# Altium PCB SIP00949AG.PcbDoc
Units mm, origin at the board's own origin, x right, y up, seen from the top; angles counter-clockwise.
Board outline 1054.6 x 677.8 mm, 2 copper layers (Top Layer, Bottom Layer); 110 components, 76 nets, 407 pads, 112 vias.
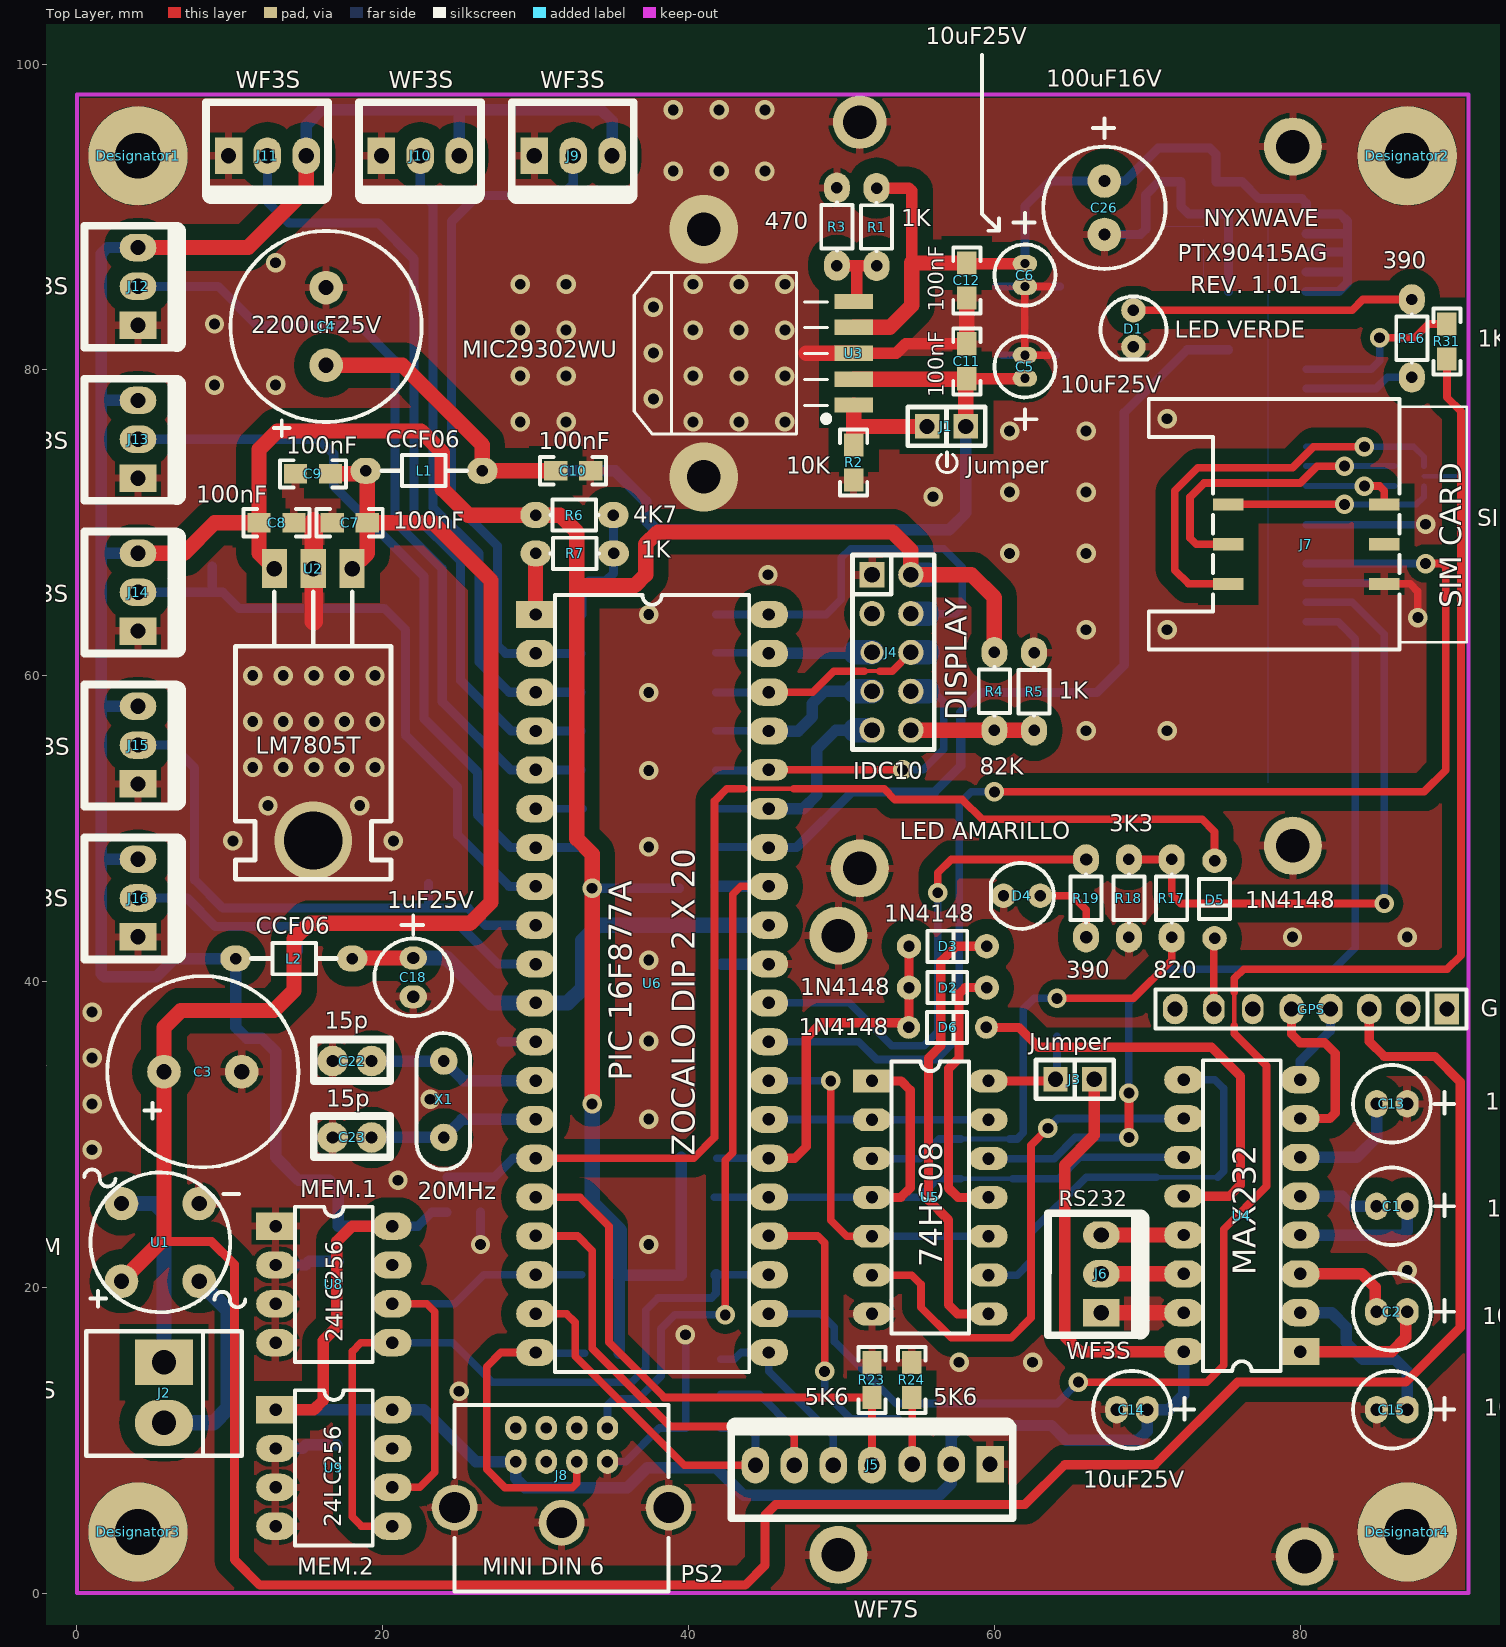
[diagram p0: Top Layer view]
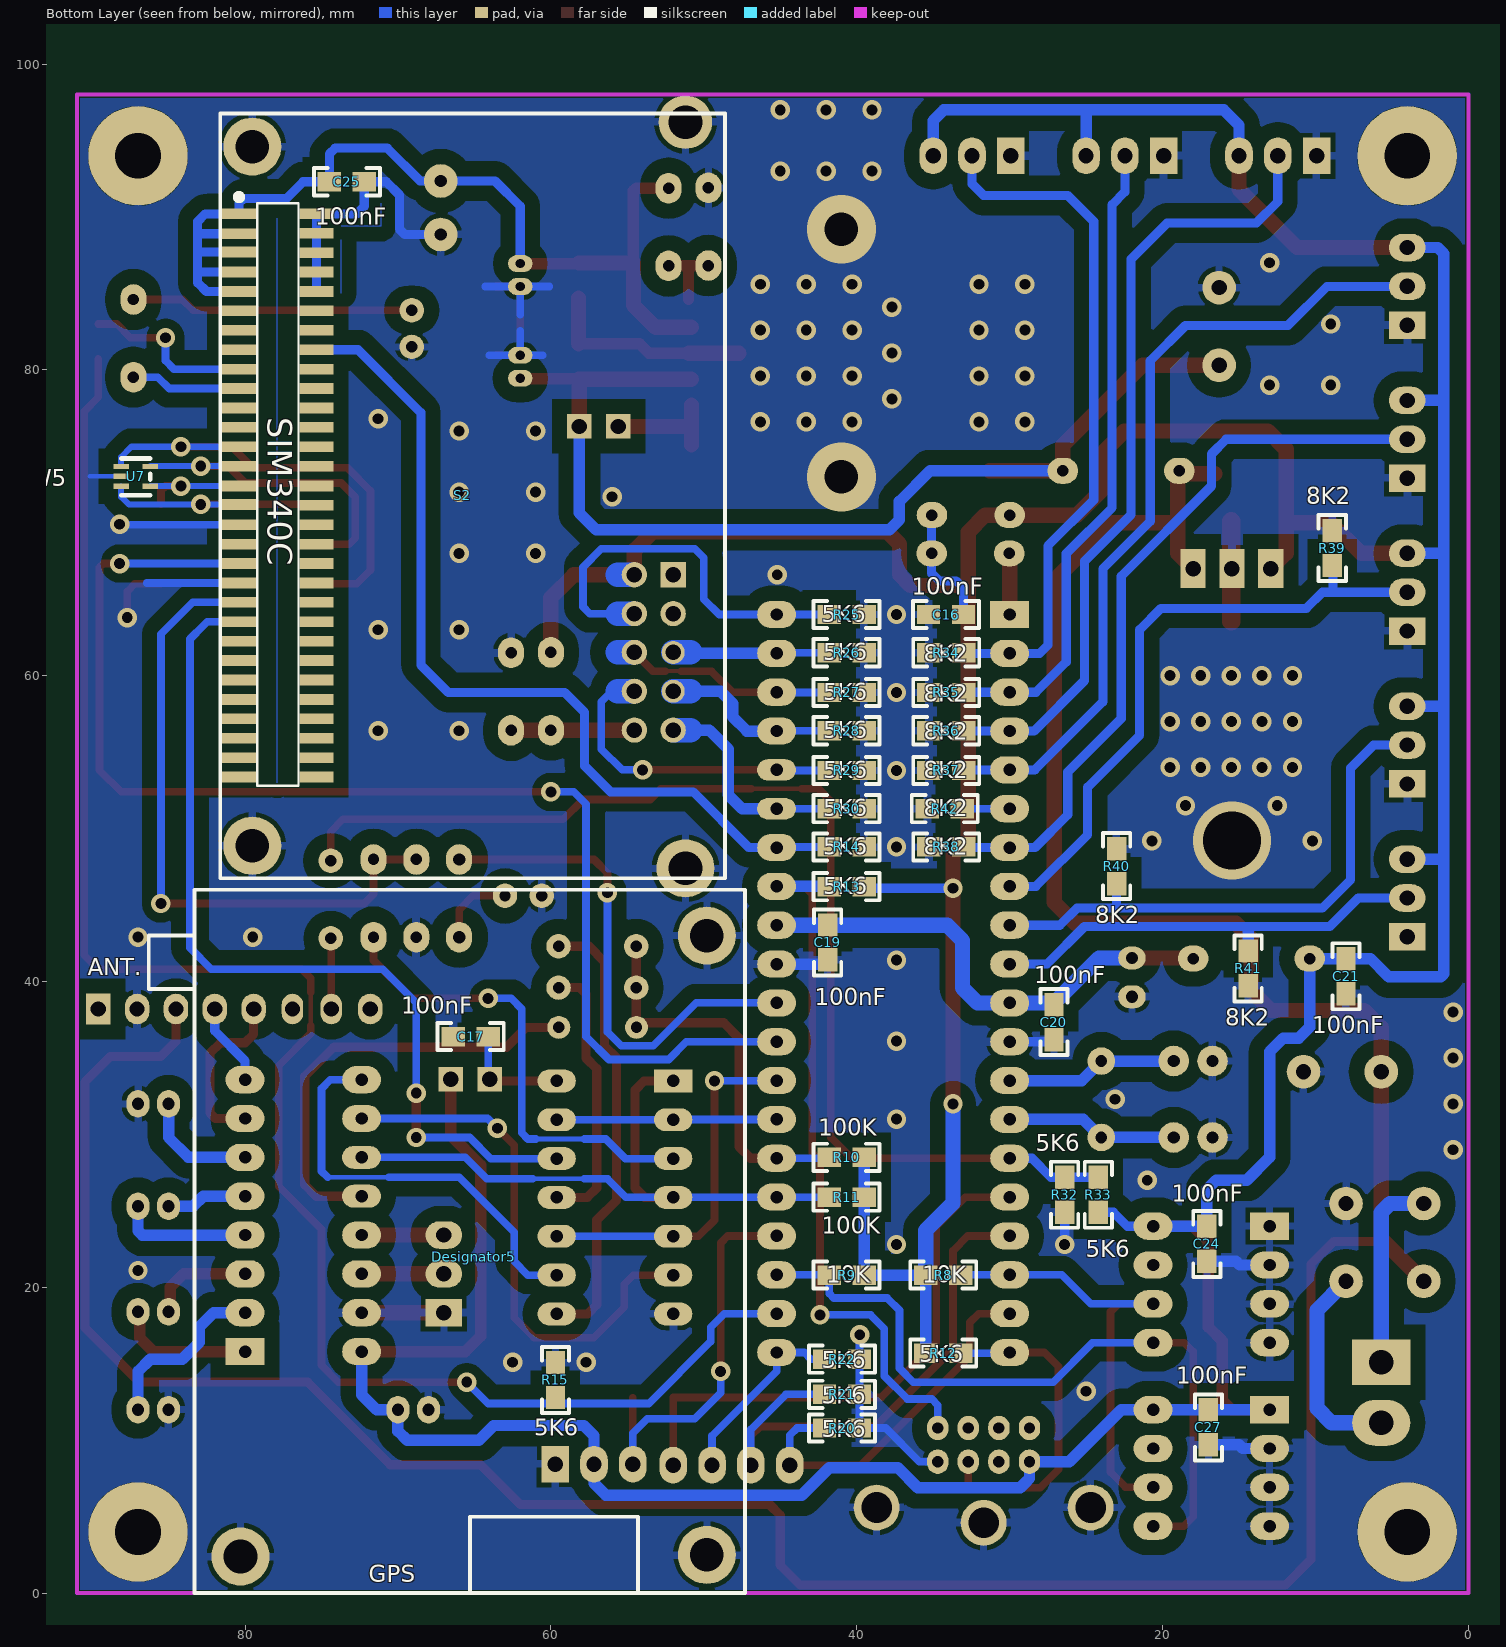
[diagram p1: Bottom Layer view, seen from below]

## Layer stack, top to bottom
Top Layer: signal copper 0.0356
Dielectric: dielectric 0.32, FR-4, Dk 4.8
Bottom Layer: signal copper 0.0356

## Board outline
-491,-342.1 -491,335.7 563.6,335.7 563.6,-342.1

## Design rules (kind name [scope] priority, off if disabled: settings)
Clearance VIAS [InNet('GND') vs (IsVia)] p1: gap=0.5
Clearance pilares [InNet('GND') vs (HasFootprint('TORNILLO 4-40'))] p2: gap=0
Clearance "Keep Out" [All vs OnLayer('Keep-Out Layer')] p3: gap=0.1
Clearance GNd [InNet('GND') vs InNet('GND')] p4: gap=0.3
Clearance [All] p5: gap=1
ComponentClearance [All] p1: gap=0.254 collisioncheckmode=3 verticalgap=0.254
PolygonConnect [All] p1: connectstyle=Relief reliefconductorwidth=0.5 reliefentries=4 polygonreliefangle="90 Angle"
RoutingVias [All] p1: holewidth=0.711 width=1.27 viastyle="Through Hole" minholewidth=0.711 minwidth=1.27 maxholewidth=0.711 maxwidth=1.27
SolderMaskExpansion [All] p1: expansion=0.102
TestPointUsage [All] p1: valid=0 allowmultiple=FALSE
Testpoint [All] p1: side=15 testpointundercomponent=TRUE minsize=1.016 maxsize=2.54 preferedsize=1.524 minholesize=0 maxholesize=1.016 preferedholesize=0.813 testpointgrid=0.025 style=1023 order=0-112345678
Width [All] p1: maxlimit=2 minlimit=0.01 preferedwidth=0.2 toplayer_prefwidth=0.6 bottomlayer_prefwidth=0.5 minimp=50.000000 maximp=50.000000 favimp=50.000000
17 further rules are at their usual default settings.

## Components (designator, comment, footprint, x,y, rotation, side; value= is the part's Value field where it differs from the comment)
C1 "10uF25V" "CE 2.0/5.0" 86,25.3 r0 top locked
C2 "10uF25V" "CE 2.0/5.0" 86,18.4 r0 top locked
C3 "2200uF25V" "CE 5.0/12.5" 5.7,34.1 r180 top locked
C4 "2200uF25V" "CE 5.0/12.5" 16.3,80.3 r270 top locked
C5 "10uF25V" "CE 1.5/4.0" 62,80.2 r270 top locked
C6 "10uF25V" "CE 1.5/4.0" 62,86.2 r90 top locked
C7 "100nF" 0805 16.7,70 r0 top locked
C8 "100nF" 0805 14.2,70 r180 top locked
C9 "100nF" 0805 14.3,73.2 r0 top locked
C10 "100nF" 0805 33.6,73.4 r180 top locked
C11 "100nF" 0805 58.2,81.7 r270 top locked
C12 "100nF" 0805 58.2,84.7 r90 top locked
C13 "10uF25V" "CE 2.0/5.0" 86,32 r0 top locked
C14 "10uF25V" "CE 2.0/5.0" 69,12 r0 top locked
C15 "10uF25V" "CE 2.0/5.0" 86,12 r0 top locked
C16 "100nF" 0805 35.3,64 r180 bottom
C17 "100nF" 0805 64.1,36.4 r0 bottom locked
C18 "1uF25V" "CE 2.5/5.0" 22,39 r90 top locked
C19 "100nF" 0805 41.9,43.7 r270 bottom locked
C20 "100nF" 0805 27.1,36.2 r90 bottom locked
C21 "100nF" 0805 8,39.2 r90 bottom locked
C22 "15p" CAP2.54 18,34.8 r0 top locked
C23 "15p" CAP2.54 18,29.8 r0 top locked
C24 "100nF" 0805 17.1,21.7 r90 bottom locked
C25 "100nF" 0805 72.2,92.3 r0 bottom locked
C26 "100uF16V" "CE 3.5/8.0" 67.2,90.6 r90 top locked
C27 "100nF" 0805 17,9.7 r90 bottom locked
D1 "LED VERDE" "LED 3MM" 69.1,81.5 r270 top locked
D2 "1N4148" DO-35_200#1 54.42,39.6 r0 top locked
D3 "1N4148" DO-35_200#1 54.42,42.3 r0 top locked
D4 "LED AMARILLO" "LED 3MM" 60.6,45.6 r180 top
D5 "1N4148" DO-35_200#1 74.4,47.9 r270 top locked
D6 "1N4148" DO-35_200#2 54.4,37 r0 top locked
Designator1 "Comment" "TORNILLO 4-40"#1 13,83 r0 top locked
Designator2 "Comment" "TORNILLO 4-40"#2 86,93.5 r0 top locked
Designator3 "Comment" "TORNILLO 4-40"#3 5.1,5.1 r0 top locked
Designator4 "Comment" "TORNILLO 4-40"#4 85.8,5.2 r0 top locked
Designator5 "Comment" "GPS 15H/L" 47.3,46 r0 bottom locked
GPS "GPS 15H" SIP8 89.6,38.2 r180 top locked (schematic designator S1)
J1 "Jumper" IDC2 55.6,76.3 r270 top locked
J2 "PW2S" PW2S 5.7,15.1 r270 top locked
J3 "Jumper" IDC2 64,33.6 r270 top locked
J4 "IDC10" IDC10 52,66.6 r270 top locked
J5 "WF7S" WF7S 52,8.5 r0 top locked
J6 "WF3S" WF3S 67,23.42 r270 top locked
J7 "SIM CARD HOLDER" "SIM CARD HOLDER" 76.3,85.9 r90 top
J8 "MINI DIN 6" "MINI DIN PCB" 30.7,8.6 r180 top locked
J9 "WF3S" WF3S 35,94 r180 top locked
J10 "WF3S" WF3S 25,94 r180 top locked
J11 "WF3S" WF3S 15,94 r180 top locked
J12 "WF3S" WF3S 4,88 r270 top locked
J13 "WF3S" WF3S 4,78 r270 top locked
J14 "WF3S" WF3S 4,68 r270 top locked
J15 "WF3S" WF3S 4,58 r270 top locked
J16 "WF3S" WF3S 4,48 r270 top locked
L1 "CCF06" AXIAL10X4_300 18.9,73.4 r0 top locked
L2 "CCF06" AXIAL10X4_300 18,41.5 r180 top locked
R1 "1K" RES_MF1/2W_200#1 52.3,86.8 r90 top locked
R2 "10K" 0805 50.8,72.8 r90 top locked
R3 "470" RES_MF1/2W_200#1 49.7,91.9 r270 top locked
R4 "82K" RES_MF1/2W_200#1 60,56.44 r90 top locked
R5 "1K" RES_MF1/2W_200#1 62.6,61.5 r270 top locked
R6 "4K7" RES_MF1/2W_200#1 30,70.5 r0 top locked
R7 "1K" RES_MF1/2W_200#1 35.1,68 r180 top locked
R8 "10K" 0805 33.2,20.8 r0 bottom locked
R9 "10K" 0805 41.8,20.8 r180 bottom locked
R10 "100K" 0805 41.8,28.5 r180 bottom locked
R11 "100K" 0805 41.8,25.9 r180 bottom locked
R12 "5K6" 0805 33.2,15.7 r0 bottom locked
R13 "5K6" 0805 41.8,46.2 r180 bottom locked
R14 "5K6" 0805 41.8,48.8 r180 bottom locked
R15 "5K6" 0805 59.7,12.8 r90 bottom locked
R16 "390" RES_MF1/2W_200#1 87.3,84.6 r270 top
R17 "820" RES_MF1/2W_200#1 71.6,42.9 r90 top locked
R18 "3K3" RES_MF1/2W_200#1 68.8,42.9 r90 top locked
R19 "390" RES_MF1/2W_200#2 66,42.9 r90 top
R20 "5K6" 0805 42.1,10.8 r180 bottom locked
R21 "5K6" 0805 42.1,13 r180 bottom locked
R22 "5K6" 0805 42.1,15.3 r180 bottom locked
R23 "5K6" 0805 52,12.8 r90 top locked
R24 "5K6" 0805 54.6,12.8 r90 top locked
R25 "5K6" 0805 41.8,64 r180 bottom locked
R26 "5K6" 0805 41.8,61.5 r180 bottom locked
R27 "5K6" 0805 41.8,58.9 r180 bottom locked
R28 "5K6" 0805 41.8,56.4 r180 bottom locked
R29 "5K6" 0805 41.8,53.8 r180 bottom locked
R30 "5K6" 0805 41.8,51.3 r180 bottom locked
R31 "1K2" 0805 89.6,83 r270 top
R32 "5K6" 0805 26.4,27.2 r270 bottom locked
R33 "5K6" 0805 24.2,27.2 r270 bottom locked
R34 "8K2" 0805 33,61.5 r0 bottom locked
R35 "8K2" 0805 33,58.9 r0 bottom locked
R36 "8K2" 0805 33,56.4 r0 bottom locked
R37 "8K2" 0805 33,53.8 r0 bottom locked
R38 "8K2" 0805 33,48.8 r0 bottom locked
R39 "8K2" 0805 8.9,67.2 r90 bottom locked
R40 "8K2" 0805 23,46.4 r90 bottom locked
R41 "8K2" 0805 14.4,42 r270 bottom locked
R42 "8K2" 0805 33.1,51.3 r0 bottom locked
S2 "SIM340C" SIM340C 77.4,90.2 r180 bottom locked
U1 "W10M" CASE22 8,20.4 r270 top locked
U2 "LM7805T" TO-220_1 18,67 r180 top locked
U3 "MIC29302WU" TO-220-5S 50.8,77.7 r90 top locked
U4 "MAX232" DIP16 80,15.8 r180 top locked
U5 "74HC08" DIP14 52,33.5 r0 top locked
U6 "PIC 16F877A" DIP40 30,64 r0 top locked
U7 "ESDA6V1W5" SOT-323-5L 85.8,72.407 r90 bottom locked
U8 "24LC256" DIP8 16.81,20.19 r0 top locked
U9 "24LC256" DIP8 16.81,8.19 r0 top locked
X1 "20MHz" UM5 24,29.8 r90 top locked

## Footprints (in the part's own frame and the unit in brackets; to place one, negate y for a bottom-side part, rotate by r counter-clockwise, add the part's x,y. Pads: shape width x height; smd on the part's side, far side on the other; paste and mask are expansions set on the pad)
0805 [mil]
  rect 60x50 smd: 1(0,0) 2(90,0)
  silkscreen extent -40,-35 130,35
AXIAL10X4_300 [mm]
  oval 2x1.7 hole 0.75: 1(0,0) 2(7.62,0)
  silkscreen extent 1.04,-1.01 6.58,1.02
CAP2.54 [mm] "CAPACITOR AXIAL 2.54"
  round 2 hole 0.8: 1(-1.27,0) 2(1.27,0)
  silkscreen extent -2.5,-1.3 2.5,1.4
CASE22 [mm]
  round 2.2 hole 1: 1(0,-5.08) 2(0,0) 3(-5.08,0) 4(-5.08,-5.08)
  silkscreen extent -7.31,-7.52 2.03,3.02
"CE 1.5/4.0" [mm]
  oval 1.1x1.6 hole 0.6: 1(0.75,0) 2(-0.75,0)
  silkscreen extent -2,-2 4.06,2
"CE 2.0/5.0" [mm]
  oval 1.5x1.8 hole 0.8: 1(1,0) 2(-1,0)
  silkscreen extent -2.54,-2.54 4.06,2.54
"CE 2.5/5.0" [mm]
  oval 1.5x1.8 hole 0.8: 1(2.54,0) 2(0,0)
  silkscreen extent -1.27,-2.54 5.33,2.54
"CE 3.5/8.0" [mm]
  round 2.2 hole 0.8: 1(1.75,0) 2(-1.75,0)
  silkscreen extent -4,-4 5.84,4
"CE 5.0/12.5" [mm]
  round 2.2 hole 1: 1(0,0) 2(-5.08,0)
  silkscreen extent -8.79,-6.25 3.71,6.25
DIP8 [mil]
  rect 100x70 hole 32: 1(-150,150)
  oval 100x70 hole 32: 2(-150,50) 3(-150,-50) 4(-150,-150) 5(150,-150) 6(150,-50) 7(150,50) 8(150,150)
  silkscreen extent -100,-200 100,200
DIP14 [mm]
  rect 2.5x1.5 hole 0.813: 1(0,0)
  oval 2.5x1.5 hole 0.813: 2(0,-2.54) 3(0,-5.08) 4(0,-7.62) 5(0,-10.16) 6(0,-12.7) 7(0,-15.24) 8(7.62,-15.24) 9(7.62,-12.7) 10(7.62,-10.16) 11(7.62,-7.62) 12(7.62,-5.08) 13(7.62,-2.54) 14(7.62,0)
  silkscreen extent 1.27,-16.51 6.35,1.27
DIP16 [mil]
  rect 100x70 hole 32: 1(0,0)
  oval 100x70 hole 32: 2(0,-100) 3(0,-200) 4(0,-300) 5(0,-400) 6(0,-500) 7(0,-600) 8(0,-700) 9(300,-700) 10(300,-600) 13(300,-300) 14(300,-200) 15(300,-100) 16(300,0)
  oval 100x59.06 hole 32: 11(300,-500) 12(300,-400)
  silkscreen extent 50,-750 250,50
DIP40 [mil]
  rect 100x70 hole 32: 1(0,0)
  oval 100x70 hole 32: 2(0,-100) 3(0,-200) 4(0,-300) 5(0,-400) 6(0,-500) 7(0,-600) 8(0,-700) 9(0,-800) 10(0,-900) 11(0,-1000) 12(0,-1100) 13(0,-1200) 14(0,-1300) 15(0,-1400) 16(0,-1500) 17(0,-1600) 18(0,-1700) 19(0,-1800) 20(0,-1900) 21(600,-1900) 22(600,-1800) 23(600,-1700) 24(600,-1600) 25(600,-1500) 26(600,-1400) 27(600,-1300) 28(600,-1200) 29(600,-1100) 30(600,-1000) 31(600,-900) 32(600,-800) 33(600,-700) 34(600,-600) 37(600,-300) 38(600,-200) 39(600,-100) 40(600,0)
  oval 100x55.12 hole 32: 35(600,-500) 36(600,-400)
  silkscreen extent 50,-1950 550,50
DO-35_200#1 [mm]
  round 1.6 hole 0.75: A(0,0) K(5.08,0)
  silkscreen extent 1.21,-1.02 3.81,1.02
DO-35_200#2 [mm]
  round 1.5 hole 0.75: A(0,0) K(5.08,0)
  silkscreen extent 1.21,-1.02 3.81,1.02
"GPS 15H/L" [mm] "GARMIN GPS 15H"
  round 3.8 hole 2.2: 0(2.5,3) 0(2.5,43.5) 0(33,43.6)
  round 1 on Bottom Overlay: 1(19,45)
  silkscreen extent 0,0 39,46
IDC2 [mm]
  rect 1.6x1.6 hole 1: 1(0,0) 2(0,2.54)
  silkscreen extent -1.27,-1.27 1.27,3.81
IDC10 [mil]
  rect 65x65 hole 40: 1(0,0)
  round 65 hole 40: 2(0,100) 3(100,0) 4(100,100) 6(200,100) 8(300,100) 9(400,0) 10(400,100)
  round 59.06 hole 40: 5(200,0) 7(300,0)
  silkscreen extent -51,-50 450,160
"LED 3MM" [mm]
  round 1.6 hole 0.75: A(-2.4,0) K(0,0)
  silkscreen extent -3.3,-2.16 0.82,2.16
"MINI DIN PCB" [mm] "CONECTOR MINI DIN 6 A 90 GRADOS PARA PCB"
  oval 1.4x1.6 hole 0.75: 1(-2,0) 2(0,0) 3(-4,0) 4(2,0) 5(-4,-2.2) 6(2,-2.2) 7(-2,-2.2) 8(0,-2.2)
  round 3 hole 2: 9(-8,3) 9(-1,4) 9(6,3)
  silkscreen extent -8,-3.7 6,8.5
PW2S [mm]
  rect 3x3.8 hole 1.6: 1(0,0)
  oval 3x3.8 hole 1.6: 2(3.962,0)
  silkscreen extent -2.03,-5.08 6.11,5.08
RES_MF1/2W_200#1 [mm]
  oval 2x1.7 hole 0.75: 1(0,0) 2(5.08,0)
  silkscreen extent 0.97,-1.02 4.11,1.02
RES_MF1/2W_200#2 [mm]
  oval 2x1.7 hole 0.813: 1(0,0) 2(5.08,0)
  silkscreen extent 0.97,-1.02 4.11,1.02
SIM340C [mm] "SIM340C"
  round 3.8 hole 2.2: 0(-2.125,-41.325) 0(-2.125,4.4) 0(26.2,-42.8)
  round 3.5 hole 2.2: 0(26.2,6)
  rect 2.2x0.7 smd: 1(-3,0) 2(2.076,0) 3(-3,-1.3) 4(2.076,-1.269) 5(-3,-2.5) 6(2.076,-2.538) 7(-3,-3.807) 8(2.076,-3.807) 9(-3,-5.076) 10(2.076,-5.076) 11(-3,-6.345) 12(2.076,-6.345) 13(-3,-7.614) 14(2.076,-7.614) 15(-3,-8.883) 16(2.076,-8.883) 17(-3,-10.152) 18(2.076,-10.152) 19(-3,-11.421) 20(2.076,-11.421) 21(-3,-12.69) 22(2.076,-12.69) 23(-3,-13.959) 24(2.076,-13.959) 25(-3,-15.228) 26(2.076,-15.228) 27(-3,-16.497) 28(2.076,-16.497) 29(-3,-17.793) 30(2.076,-17.793) 31(-3,-19) 32(2.076,-19.062) 33(-3,-20.331) 34(2.076,-20.331) 35(-3,-21.6) 36(2.076,-21.6) 37(-3,-22.869) 38(2.076,-22.869) 39(-3,-24.138) 40(2.076,-24.138) 41(-3,-25.407) 42(2.076,-25.407) 43(-3,-26.676) 44(2.076,-26.676) 45(-3,-27.945) 46(2.076,-27.945) 47(-3,-29.214) 48(2.076,-29.214) 49(-3,-30.483) 50(2.076,-30.483) 51(-3,-31.752) 52(2.076,-31.752) 53(-3,-33.021) 54(2.076,-33.021) 55(-3,-34.29) 56(2.076,-34.29) 57(-3,-35.559) 58(2.076,-35.559) 59(-3,-36.828) 60(2.076,-36.828)
  silkscreen extent -4.23,-43.45 28.77,6.58
"SIM CARD HOLDER" [mm] "SIM CARD HOLDER"
  rect 0.8x2 smd: 1(-19.9,1) 2(-17.3,1) 3(-14.7,1) 4(-19.9,-9.2) 5(-17.3,-9.2) 6(-14.7,-9.2)
  silkscreen extent -24.2,-14.6 -7.8,6.2
SIP8 [mm]
  rect 1.6x2 hole 1: 1(0,0)
  oval 1.6x2 hole 1: 2(2.54,0) 3(5.08,0) 4(7.62,0) 5(10.16,0) 8(17.78,0)
  oval 1.4x2 hole 1: 6(12.7,0) 7(15.24,0)
  silkscreen extent -1.27,-1.27 19.05,1.27
SOT-323-5L [mm]
  rect 0.35x1 smd: 1(-0.025,0.4) 2(1.275,0.4) 3(0.625,2.3) 4(-0.025,2.3) 5(1.275,2.3)
  silkscreen extent -0.6,0.4 1.8,2.3
TO-220-5S [mm]
  rect 1x2.5 smd: 1(0,0) 2(1.693,0) 3(3.387,0) 4(5.08,0) 5(6.773,0)
  silkscreen extent -1.91,1.6 8.68,14.35
TO-220_1 [mil]
  rect 65x100 hole 40: 1(0,0) 2(100,0) 3(200,0)
  silkscreen extent -100,60 300,800
"TORNILLO 4-40"#1 [mm] "Agujero para tornillo 4-40 con pilar de 6 mm"
  round 6.5 hole 3: 1(-9,11)
"TORNILLO 4-40"#2 [mm] "Agujero para tornillo 4-40 con pilar de 6 mm"
  round 6.5 hole 3: 1(1,0.5)
"TORNILLO 4-40"#3 [mm] "Agujero para tornillo 4-40 con pilar de 6 mm"
  round 6.5 hole 3: 1(-1.1,-1.1)
"TORNILLO 4-40"#4 [mm] "Agujero para tornillo 4-40 con pilar de 6 mm"
  round 6.5 hole 3: 1(1.2,-1.2)
UM5 [mm] "UM-5"
  round 1.8 hole 0.762: 1(0,0) 2(5,0)
  silkscreen extent -2.1,-1.72 6.83,1.78
WF3S [mm]
  rect 1.8x2.4 hole 1: 1(5.08,0)
  oval 1.8x2.4 hole 1: 2(2.54,0) 3(0,0)
  silkscreen extent -1.42,-3.51 6.55,2.54
WF7S [mm]
  rect 1.8x2.4 hole 1: 1(7.72,-0.065)
  oval 1.8x2.4 hole 1: 2(5.18,-0.065) 3(2.64,-0.065) 4(0,-0.127) 5(-2.54,-0.127) 6(-5.08,-0.127) 7(-7.62,-0.127)
  silkscreen extent -9.2,-3.6 9.2,2.41

## Part data
C1 C2 C13 C14 C15: library part "10uF25V 5X11X2", "CAPACITOR ELECTROLITICO RADIAL 5X11mm PASO 2mm 85ªC +/-20 25V 10uF"
C3 C4: library part 2200uF16V, "CAPACITOR ELECTROLITICO RADIAL 10X20 mm PASO 5 mm +/-20% 85ºC 16V 2200uF"
C5 C6: library part "10uF25V 4X7X1.5", "CAPACITOR ELECTROLITICO RADIAL 5X7mm PASO 1.5mm 85ªC +/-20 25V 10uF"
C7 C8 C9 C10 C11 C12 C16 C17 C19 C20 C21 C24 C25 C27: library part 100n, "CAPACITOR SMD 0805 X7R  50 V 100 nF"
C18: "CAP ELECT RAD 1.0UF 25V 5X11MM PASO 2MM 85ºC"
C22 C23: "CAPACITOR CERAMICO DISCO 2.54 mm  X7R  50V  15pF"
C26: "CAP ELECT RADIAL 100UF 16V 6.3X12MM PASO 2.5MM 85ºC 20%"
D1: library part "LED VERDE 3MM", "LED VERDE 3MM"
D2 D3 D5 D6: library part "1N4148 DO-35", "1N4148 DO-35 DIODO"
D4: library part "LED AMARILLO 3MM", "LED AMARILLO 3MM"
GPS: "GARMIN GPS 15H"
J2: "PW2S HEADER .156\" RECTO 2 VIAS"
J4: "CONECTOR IDC HEMBRA PCB NO POLARIZADO PASO 2.54 mm RECTO 2X5 VIAS"
J5: "WF7S HEADER .100\" RECTO 7 VIAS"
J6: library part WF3R, "WF3R HEADER .100\" 90º 3 VIAS"
J7: "ZOCALO PARA TARJETA DE MEMORIA SIM"
J8: library part "CONECTOR MINI DIN 6", "CONECTOR MINI DIN 6 PARA PCB"
J9 J10 J11 J12 J13 J14 J15 J16: "WF3S HEADER .100\" RECTO 3 VIAS"
L1 L2: "INDUCTOR CCF06"
R1 R5 R7: "RESISTOR METAL FILM 0.5 W 5% 1 K OHMS"
R2 R8 R9: "RESISTOR SMD0805 0.125 W 5%  10 K OHMS"
R3: "RESISTOR METAL FILM 0.5 W 5% 470 OHMS"
R4: "RESISTOR METAL FILM 0.5 W 5% 82 KILOHMS"
R6: "RESISTOR METAL FILM 0.5 W 5% 4.7 KILOHMS"
R10 R11: "RESISTOR SMD0805 0.125 W 5%  100 K OHMS"
R12 R13 R14 R15 R20 R21 R22 R23 R24 R25 R26 R27 R28 R29 R30 R32 R33: "RESISTOR SMD0805 0.125 W 5%  5.6 K OHMS"
R16 R19: "RESISTOR METAL FILM 0.5 W 5% 390 OHMS"
R17: "RESISTOR METAL FILM 0.5 W 5% 820 OHMS"
R18: "RESISTOR METAL FILM 0.5 W 5% 3.3 KILOHMS"
R31: "RESISTOR METAL FILM 0.5 W 5% 1.2 KILOHMS"
R34 R35 R36 R37 R38 R39 R40 R41 R42: "RESISTOR SMD0805 0.125 W 5%  8.2 K OHMS"
S2: library part "SIM340C QUAD-BAND GSM/GPRS", "SIM340C QUAD-BAND GSM/GPRS GSM850MHz/EGSM900MHz/DCS18000MHz/PCS1900MHz"
U1: "W10M CASE22 CIRC INT RECTIFICADOR PUENTE 1000V 1A"
U2: "LM7805T TO-220 CIRC INT"
U3: "MIC29302WU TO-220 (T) HIGH CURRENT LOW DROPOUT REGULATORS"
U4: library part "MAX232 DIP-16", "MAX232 DIP-16 CIRCUITO INTEGRADO"
U5: library part "74HC08 DIP", "74HC08 DIP-14 QUAD 2-INPUT AND GATE"
U6: "PIC16F877A-I/P DIP-40 MICROCHIP"
U7: "ESDA6V1W5 ARRAY  FOR ESD PROTECTION"
U8 U9: "256K I2C CMOS Serial EEPROM"
X1: library part CRYSTAL, "20.000 MHZ XL20M-UM5 10PPM CRISTAL"

## Free pads (board coordinates)
  round 1.2 on Top Overlay: 0(49.6,66.6)

## Via types
v1: diameter 1.27, hole 0.711, Top Layer to Bottom Layer, 109 vias
v2: diameter 4.5, hole 2.2, Top Layer to Bottom Layer, 2 vias
v3: diameter 5.08, hole 3.81, Top Layer to Bottom Layer, 1 vias

## Nets (pads, with @x,y where several pads share a name; then routed paths per layer and width w, separated by ;. In a path a pad name is that pad's centre, name@x,y a point inside that pad or via, vN(x,y) a via of type N, cw(c..) or ccw(c..) an arc to the next point about the centre after c; other vN are vias at no path point)
+5V: C8.2 C14.1 C21.2 C24.2 C27.2 J3.2 J4.2 J5.2 J8.4 J9.3 J10.3 J11.3 J12.3 J13.3 J14.3 J15.3 J16.3 L2.2 R4.2 R6.1 R8.2 R9.2 R10.2 R11.2 R12.2 R13.2 R33.2 U2.3 U4.16 U8.8 U9.1 U9.8 | length 408.4
  Top Layer w0.75: U9.1 15.5,12 16.1,12.6 16.1,16.5 17,17.4 17,23 18,24 U8.8 ; J3.2 66.54,29.94 64.6,28 64.6,16.8 65.6,15.8 U4.16
  Top Layer w1: J14.3 7,68 9,70 C8.2 ; J12.3 11.2,88 15,91.8 J11.3 ; U2.3 11.914,68.006 11.914,74.8 13.114,76 22.5,76 23.9,74.6 23.9,72.2 25.6,70.5 31.6,70.5 32.7,69.4 32.7,49.334 33.7,48.334 v1(33.7,32) ; 32.7,65.9 36.5,65.9 37.2,66.6 37.2,68.6 38,69.4 53.34,69.4 54.54,68.2 J4.2 58.5,66.6 60,65.1 R4.2
  Bottom Layer w0.6: U8.8 22.3,24 23.214,24.914 R33.2 ; v1(33.7,46.1) R13.2@39.414,46.1
  Bottom Layer w0.75: 1.6,48 J16.3 ; 1.6,58 J15.3 ; 1.6,68 J14.3 ; 1.6,78 J13.3 ; J12.3@3.158,88 2,88 1.6,87.6 1.6,40.5 1.8,40.3 5.2,40.3 6.4,41.5 L2.2 10.38,37.02 11.1,36.3 12.1,36.3 13,35.4 13,28.5 14.5,27 16.5,27 17.1,26.4 C24.2 U8.8@20.62,23.986 ; U9.1 C27.2@16.986,12 ; J11.3 15,96 16,97 34.3,97 35,96.3 J9.3 ; C27.2@17.014,12 22.7,12 26.1,8.6 J8.4 28.7,7.5 28.951,7.249 29.3,6.9 36,6.9 37.3,8.2 41.8,8.2 43.6,6.4 56.4,6.4 57.18,7.18 57.18,10.3 57.844,10.964 63.736,10.964 64.7,10 69.4,10 70,10.6 C14.1 71.4,12 72.38,12.98 U4.16 ; J10.3 25,97 ; R12.2 R8.2 R9.2 R10.2
  Bottom Layer w1: v1(33.7,32) 33.7,25.5 35.486,23.714 R8.2
  Bottom Layer w1.6: J4.2 55.64,66.6
AD4: J4.7 R28.1 U6.37 | length 12.9
  Bottom Layer w0.5: R28.1 45.22,56.4 U6.37
  Bottom Layer w0.75: U6.37 47.18,56.38 48.1,57.3 48.1,58.18 48.9,58.98 J4.7
  Bottom Layer w1.6: 50.9,58.98 J4.7
AD5: J4.6 R27.1 U6.38 | length 14.9
  Top Layer w0.25: 51.482,60.3 52.518,60.3
  Top Layer w0.5: U6.38 48.12,58.92 49.5,60.3 51.482,60.3 ; 52.518,60.3 53.32,60.3 J4.6
  Bottom Layer w0.5: R27.1 U6.38@45.22,58.9
  Bottom Layer w1.6: J4.6 55.64,61.52
AD6: J4.5 R26.1 U6.39 | length 11.3
  Bottom Layer w0.5: R26.1 U6.39@45.26,61.5
  Bottom Layer w0.75: U6.39 J4.5@51.94,61.46
  Bottom Layer w1.6: 50.9,61.52 J4.5
AD7: J4.4 R25.1 U6.40 | length 27.2
  Bottom Layer w0.5: R25.1 49,64 50,65 50,67.7 50.6,68.3 56.7,68.3 57.9,67.1 57.9,64.5 57.46,64.06 J4.4
  Bottom Layer w1.6: J4.4 55.64,64.06
AUX_1: J5.3 R24.1 U6.24 | length 26.8
  Top Layer w0.5: U6.24 48.44,23.36 48.9,22.9 v1(48.9,14.5) ; J5.3 R24.1@54.64,12.76
  Bottom Layer w0.5: v1(48.9,14.5) 48.9,13.1 50.6,11.4 53.7,11.4 54.64,10.46 J5.3
AUX_2: J5.4 R23.1 U6.16 | length 36.3
  Top Layer w0.5: U6.16 32.9,25.9 34.8,24 34.8,16.4 38.4,12.8 R23.1 J5.4
AUX_3: J5.5 R22.1 U6.21 | length 12.4
  Bottom Layer w0.5: R22.1 43,15.3 43.44,15.74 U6.21 45.24,14.52 49.46,10.3 J5.5
AUX_4: J5.6 R21.1 U6.17 | length 36.1
  Top Layer w0.5: U6.17 32.74,23.36 33.7,22.4 33.7,16 38.8,10.9 46.32,10.9 46.92,10.3 J5.6
  Bottom Layer w0.5: R21.1 44.62,13 46.92,10.7 J5.6
AUX_5: J5.7 R20.1 U6.19 | length 24.2
  Top Layer w0.5: U6.19 32.02,18.28 32.6,17.7 32.6,15.5 39.727,8.373 J5.7
  Bottom Layer w0.5: R20.1 43.9,10.8 44.38,10.32 J5.7
CLOCK_GPS: D5.K GPS.7 | length 4.6
  Top Layer w0.5: GPS.7 D5.K@74.36,42.78
DCD: S2.37 U6.29 | length 84
  Top Layer w0.5: v1(60,52.4) 88.1,52.4 89.523,53.823 89.523,67.077 89.269,67.331 v1(88.2,67.331)
  Bottom Layer w0.5: U6.29 51.14,36.06 52.3,34.9 56.2,34.9 57.7,36.4 57.7,51.6 58.5,52.4 v1(60,52.4) ; S2.37 v1(88.2,67.331)
E: J4.8 R29.1 U6.36 | length 22.4
  Top Layer w0.5: U6.36 v1@54.34,53.84
  Bottom Layer w0.5: R29.1 U6.36@45.2,53.8 ; v1(54,53.84) 55.34,53.84 56.7,55.2 56.7,58.3 56.02,58.98 J4.8
  Bottom Layer w1.6: J4.8 55.64,58.98
ENCENDIDO: R15.1 R31.2 U6.22 | length 116
  Top Layer w0.3: 75.7,37.086 75.7,39.386
  Top Layer w0.5: v1(65.5,13.8) 73.9,13.8 75,14.9 75,23.8 77.8,26.6 77.8,34.5 75.7,36.6 75.7,37.086 ; 75.7,39.314 75.7,40.2 76.3,40.8 89.6,40.8 90.523,41.723 90.523,77.277 89.6,78.2 R31.2
  Bottom Layer w0.5: U6.22 48.661,18.28 49.541,17.4 49.541,16.459 53.6,12.4 64.1,12.4 v1(65.5,13.8)
ESTADO: R19.2 U6.30 | length 33.2
  Top Layer w0.5: v1(56.3,45.8) 56.3,47.1 57.18,47.98 R19.2
  Bottom Layer w0.5: U6.30 50.5,38.6 53.3,35.8 55.4,35.8 56.3,36.7 v1@56.3,45.9
GND: C3.2 C4.2 C5.2 C6.2 C7.1 C8.1 C9.1 C10.1 C11.1 C12.1 C13.1 C14.2 C15.2 C16.1 C17.2 C18.2 C19.2 C20.1 C21.1 C22.1 C23.1 C24.1 C25.1 C26.2 C27.1 D1.K D4.K Designator1.1 Designator2.1 Designator3.1 Designator4.1 Designator5.0 GPS.2 J4.1 J5.1 J6.1 J7.4 J8.3 J8.9 J9.1 J10.1 J11.1 J12.1 J13.1 J14.1 J15.1 J16.1 R2.1 R3.1 R5.1 R14.2 R15.2 R18.1 R20.2 R21.2 R22.2 R23.2 R24.2 R25.2 R26.2 R27.2 R28.2 R29.2 R30.2 R32.2 R34.2 R35.2 R36.2 R37.2 R38.2 R39.2 R40.2 R41.2 R42.2 S2.0 S2.2 S2.4 S2.6 S2.8 S2.10 S2.33 S2.39 U1.3 U2.2 U3.3 U4.15 U5.7 U6.12 U6.31 U7.3 U8.1 U8.2 U8.3 U8.4 U9.2 U9.3 U9.4 | length 109.7
  Top Layer w0.5: 63.549,80.95 C5.2 C6.2 63.549,85.45 ; J7.4 87.2,66 87.7,65.5 v1(87.7,63.8)
  Top Layer w0.75: U3.3 53.587,81.087 54.2,81.7 C11.1
  Top Layer w1: 47.7,81.087 U3.3@51,81.087 ; C11.1 C12.1 ; J6.1 U4.15
  Top Layer w1.2: 15.5,63.56 15.5,70.1
  Bottom Layer w0.3: U7.3 90.168,73.032
  Bottom Layer w0.5: J8.3 35.9,8.6 38.1,10.8 R20.2 v1@39.814,16.886 ; 60.1,85.45 64.3,85.45 ; 60.529,80.95 64.04,80.95 ; C5.2 62,82.554 ; 62,83.621 C6.2 ; S2.39 86.438,66.062 ; S2.33 v1@87.7,69.869
  Bottom Layer w0.6: v1(26.4,22.8) R32.2 ; 27.74,36.06 U6.12 ; C26.2 69.55,88.85 69.9,89.2 69.9,91.437 70.763,92.3 C25.1 72.2,90.7 72.7,90.2 S2.2 S2.10
  Bottom Layer w0.75: U9.2 14.76,9.46 15,9.7 C27.1 ; U8.2 14.96,21.46 15.2,21.7 C24.1 ; C19.2@42.174,41.14 U6.31
  other v1: 25,13.2 57.7,15.1 62.5,15.1 39.8,16.9 87,21.1 37.4,22.8 21,27 1,29 37.4,31 1,32 23.1,32.3 1,35 37.4,36.1 1,38 37.4,41.4 79.5,42.9 87,42.9 37.4,48.8 10.2,49.2 20.7,49.2 12.5,51.5 18.5,51.5 37.4,53.8 11.5,54 13.5,54 15.5,54 17.5,54 19.5,54 66,56.4 71.3,56.4 11.5,57 13.5,57 15.5,57 17.5,57 19.5,57 37.4,58.9 11.5,60 13.5,60 15.5,60 17.5,60 19.5,60 66,63 71.3,63 37.4,64 45.2,66.6 61,68 66,68 88.2,69.9 56,71.7 61,72 66,72 61,76 66,76 29,76.6 32,76.6 40.3,76.6 43.3,76.6 46.3,76.6 71.3,76.8 37.7,78.1 9,79 13,79 29,79.6 32,79.6 40.3,79.6 43.3,79.6 46.3,79.6 37.7,81.1 29,82.6 32,82.6 40.3,82.6 43.3,82.6 46.3,82.6 9,83 37.7,84.1 29,85.6 32,85.6 40.3,85.6 43.3,85.6 46.3,85.6 13,87 39,93 42,93 45,93 39,97 42,97 45,97
  other v2: 41,73 41,89.2
  other v3: 15.46,49.22
GPS: U5.5 U5.10 U6.28 | length 23.9
  Top Layer w0.5: v1(49.3,33.5) 49.3,24.4 50.36,23.34 U5.5
  Bottom Layer w0.5: U6.28 v1@49.28,33.52 ; U5.5 U5.10
I2C_SCL: R8.1 U6.18 U8.6 U9.6 | length 29.9
  Top Layer w0.5: U9.6 22.42,6.92 23.4,7.9 23.4,18.4 22.88,18.92 U8.6
  Bottom Layer w0.5: U8.6 24.7,18.92 26.6,20.82 R8.1@33.02,20.82
I2C_SDA: R9.1 U6.23 U8.5 U9.5 | length 48.1
  Top Layer w0.5: U9.5 18.62,4.38 18,5 18,15.8 18.58,16.38 U8.5
  Bottom Layer w0.5: U8.5 24.58,16.38 27.16,13.8 36.3,13.8 37.2,14.7 37.2,18.5 38,19.3 41.5,19.3 41.8,19.6 R9.1 ; R9.1@41.82,20.82 U6.23
  Bottom Layer w0.75: R9.1@41.82,20.8 R9.1@41.82,20.82
MODEM: U5.2 U5.13 U6.27 | length 14.4
  Bottom Layer w0.5: U6.27 U5.2@51.98,30.98 ; U5.2 U5.13
NET_STATE: R14.1 S2.16 U6.34 | length 58.7
  Bottom Layer w0.5: R14.1 U6.34@45.2,48.8
  Bottom Layer w0.6: U6.34 47.06,48.76 50.699,52.399 56.099,52.399 57.8,54.1 57.8,57.6 59.1,58.9 66.7,58.9 68.5,60.7 68.5,77.2 72.617,81.317 S2.16
  Bottom Layer w0.75: U6.34@45.2,48.76 U6.34
NetC1_1: C1.1 U4.4 | length 8.8
  Bottom Layer w0.75: U4.4 86.72,23.42 87,23.7 C1.1 ; C1.1@86.9,25.3 C1.1@86.9,25.4
NetC1_2: C1.2 U4.5 | length 5.3
  Bottom Layer w0.75: U4.5 82.74,25.96 83.4,25.3 C1.2
NetC2_1: C2.1 U4.1 | length 9
  Top Layer w0.75: U4.1 86,15.8 86.9,16.7 C2.1@86.9,18.4
NetC2_2: C2.2 U4.3 | length 6.9
  Top Layer w0.75: U4.3 84.02,20.88 84.9,20 C2.2@84.9,18.4
NetC4_1: C4.1 C5.1 C10.2 C11.2 J1.2 L1.2 U3.2 | length 73.1
  Top Layer w0.75: C11.2 C5.1@61.964,79.414
  Top Layer w1: C4.1 21.3,80.3 26.52,75.08 L1.2 C10.2 ; U3.2 C11.2@58.179,79.393 ; J1.2 C11.2@58.14,79.354
  Bottom Layer w0.75: L1.2 35.2,73.4 37.203,71.397 37.203,70.197 37.855,69.545 57.045,69.545 58.14,70.64 J1.2
NetC13_2: C13.2 U4.6 | length 7.7
  Bottom Layer w0.75: U4.6 83.7,28.5 85,29.8 C13.2
NetC15_1: C15.1 U4.2 | length 11.7
  Bottom Layer w0.75: U4.2 82.06,18.34 83,17.4 83,16.4 84.1,15.3 86.2,15.3 87,14.5 C15.1
NetC16_2: C16.2 R6.2 R7.1 | length 8
  Bottom Layer w0.6: C16.2 33.014,65.714 33.5,66.2 34.6,66.2 35.1,66.7 R6.2@35.1,70.48
  Bottom Layer w0.75: R6.2@35.08,70.48 R6.2
NetC17_1: C17.1 J3.1 U5.14 | length 7.2
  Top Layer w0.6: U5.14 J3.1@64.1,33.5
  Bottom Layer w0.5: J3.1@64.1,33.7 C17.1
NetC22_2: C22.2 U6.13 X1.2 | length 11.3
  Bottom Layer w0.75: C22.2 X1.2 25.28,33.52 U6.13
NetC23_2: C23.2 U6.14 X1.1 | length 11.2
  Bottom Layer w0.75: C23.2 X1.1 25.18,30.98 U6.14
NetD1_A: D1.A R16.1 | length 18.6
  Top Layer w0.5: D1.A 83.4,83.9 84.1,84.6 R16.1
  Top Layer w1: D1.A D1.A@69.1,84
NetD2_K: D2.K U5.11 | length 17.8
  Top Layer w0.6: D2.K 58.1,39.6 57.7,39.2 57.7,35 57,34.3 57,26.5 57.62,25.88 U5.11
NetD3_K: D3.K U5.8 | length 29.6
  Top Layer w0.6: D3.K 57.5,42.3 56.5,41.3 56.5,35.8 55.7,35 55.7,25.7 57,24.4 57,18.86 57.6,18.26 U5.8
NetD4_A: D4.A R19.1 | length 5.2
  Top Layer w0.5: D4.A 65.1,45.6 66,44.7 R19.1
NetD6_K: D6.K U4.12 | length 29.1
  Top Layer w0.6: D6.K 61.6,37 62.9,35.7 74.2,35.7 76.1,33.8 76.1,26.7 75.36,25.96 U4.12
NetJ1_1: J1.1 R2.2 U3.1 | length 7.4
  Top Layer w1: R2.2 U3.1 ; 50.8,76.3 J1.1
NetJ2_1: J2.1 U1.4 | length 12.8
  Bottom Layer w1: U1.4 5.12,25.48 5.7,24.9 J2.1
NetJ2_2: J2.2 U1.2 | length 13.7
  Bottom Layer w1: J2.2 8.938,11.138 9.9,12.1 9.9,18.5 U1.2
NetJ4_10: J4.10 R4.1 R5.2 | length 8
  Top Layer w1: J4.10 R5.2@62.58,56.44
NetR1_1: R1.1 R3.2 U3.5 | length 4.7
  Top Layer w0.75: R3.2 R1.1@52.22,86.82 ; U3.5@51,84.6 51,86.82
NetR7_2: R7.2 U6.1 | length 4
  Top Layer w1: U6.1 R7.2@30,67.98
NetR16_2: R16.2 S2.19 | length 7.2
  Bottom Layer w0.5: S2.19 84.959,78.779 85.7,79.52 R16.2
NetR17_2: R17.2 R18.2 S2.41 | length 42.8
  Top Layer w0.5: R18.2 R17.2 71.6,45.7 72.2,45.1 v1(85.5,45.1)
  Bottom Layer w0.5: S2.41 83.407,64.793 85.5,62.7 v1(85.5,45.1)
NetR31_1: R31.1 S2.17 | length 11.3
  Top Layer w0.5: v1(85.2,82.1) 87.5,82.1 88.4,83 R31.1
  Bottom Layer w0.5: S2.17 84.648,80.048 85.2,80.6 v1(85.2,82.1)
PS2_CL: J8.5 R13.1 U6.33 | length 47.1
  Top Layer w0.5: v1(42.4,18.2) 42.4,28.3 42.9,28.8 42.9,45.7 43.42,46.22 U6.33
  Bottom Layer w0.5: J8.5 34.7,12.3 35.1,12.7 36.7,12.7 38.2,14.2 38.2,17.3 39.1,18.2 v1(42.4,18.2)
  Bottom Layer w0.75: R13.1@41.82,46.22 U6.33
PS2_DA: J8.1 R12.1 U6.20 | length 21.3
  Top Layer w0.5: U6.20 27.74,15.74 26.8,14.8 26.8,8.1 28,6.9 32.4,6.9 32.7,7.2 J8.1
  Bottom Layer w0.5: U6.20@30.1,15.7 R12.1
RS: J4.9 R30.1 U6.35 | length 15.2
  Bottom Layer w0.5: R30.1 U6.35
  Bottom Layer w0.75: U6.35 47.5,51.3 48.4,52.2 48.4,55.2 49.64,56.44 J4.9
  Bottom Layer w1.6: 50.9,56.44 J4.9
RXD: D2.A D3.A D6.A R10.1 U6.26 | length 25.3
  Top Layer w0.6: U6.26 46.94,28.44 47.7,29.2 47.7,36.3 48.7,37.3 D6.A@54.4,37.3 ; D6.A@54.42,37.32 D3.A
  Bottom Layer w0.5: R10.1@41.86,28.44 U6.26
RXD_GPS: U4.10 U5.6 | length 35.5
  Top Layer w0.5: U5.6 54.6,20.8 55.2,20.2 55.2,18.7 57.2,16.7 61.1,16.7 62.4,18 62.4,29.3 v1(63.5,30.4)
  Bottom Layer w0.5: v1(63.5,30.4) 64.14,31.04 U4.10
RXD_MODEM: R17.1 U5.3 | length 31.3
  Top Layer w0.5: v1(64.1,38.9) 69.1,38.9 71.6,41.4 R17.1
  Bottom Layer w0.3: 57.8,29.7 61.1,29.7
  Bottom Layer w0.5: U5.3 55.12,28.42 56.4,29.7 57.8,29.7 ; 61,29.7 61.5,29.7 61.9,30.1 61.9,38.2 62.6,38.9 v1(64.1,38.9)
RXD_RS232: J6.3 U4.13 | length 5.9
  Top Layer w1: J6.3@66.52,23.42 U4.13
RXD_RS232_GPS: GPS.5 U4.7 | length 11.4
  Top Layer w0.6: GPS.5 79.44,36.56 80,36 81.6,36 82.3,35.3 82.3,31.4 81.94,31.04 U4.7
S/N: R42.1 U6.6 | length 3.1
  Bottom Layer w0.5: U6.6 R42.1
SENSOR_0: J9.2 R34.1 U6.2 | length 45.4
  Bottom Layer w0.6: J9.2 32.46,92.16 31.7,91.4 26.2,91.4 24.5,89.7 24.5,71.488 27.5,68.488 27.5,62 28.04,61.46 R34.1@32.96,61.46
SENSOR_1: J10.2 R35.1 U6.3 | length 42.2
  Bottom Layer w0.6: J10.2 22.46,91.64 23.3,90.8 23.3,70.991 26.3,67.991 26.3,60.9 28.28,58.92 R35.1@32.98,58.92
SENSOR_2: J11.2 R36.1 U6.4 | length 52.2
  Bottom Layer w0.6: J11.2 12.46,91 13.86,89.6 19.7,89.6 22.052,87.248 22.052,70.542 25.1,67.494 25.1,59.68 28.4,56.38 R36.1@32.98,56.38
SENSOR_3: J12.2 R37.1 U6.5 | length 53.3
  Bottom Layer w0.6: J12.2 9.24,85.46 11.8,82.9 18.5,82.9 20.8,80.6 20.8,70.097 23.9,66.997 23.9,58.3 28.36,53.84 R37.1@32.96,53.84
SENSOR_4: J13.2 R38.1 U6.7 | length 48.4
  Bottom Layer w0.6: J13.2@3.9,75.5 J13.2@4,75.5 ; J13.2 15.84,75.46 16.8,74.5 16.8,72.4 22.7,66.5 22.7,57.2 26.2,53.7 26.2,50.9 28.34,48.76 R38.1@32.96,48.76
SENSOR_5: J14.2 R39.1 U6.8 | length 41.5
  Bottom Layer w0.6: J14.2 9.54,65.46 10.6,64.4 20.1,64.4 21.5,63 21.5,56.1 24.9,52.7 24.9,49.6 28.28,46.22 U6.8 ; 8.86,65.46 R39.1@8.86,67.16
SENSOR_6: J15.2 R40.1 U6.9 | length 36.8
  Bottom Layer w0.6: J15.2 6.2,55.46 7.7,53.96 7.7,46.657 9.557,44.8 25.597,44.8 26.717,43.68 U6.9 ; 23,44.8 R40.1
SENSOR_7: J16.2 R41.1 U6.10 | length 29.3
  Bottom Layer w0.6: J16.2 7.2,45.46 9.06,43.6 25.1,43.6 27.56,41.14 U6.10
  Bottom Layer w0.75: R41.1 14.4,43.5
SIM_CLOCK: J7.3 S2.31 U7.4 | length 16.2
  Top Layer w0.5: J7.3 v1(82.9,71.2)
  Bottom Layer w0.4: S2.31 87.6,71.2 88.1,71.7 U7.4@88.1,72.357
SIM_DATA: J7.6 S2.29 U7.1 | length 8.1
  Top Layer w0.5: v1(84.2,72.4) 85.2,72.4 85.5,72.1 J7.6
  Bottom Layer w0.4: S2.29 U7.1@86.168,72.407
SIM_RESET: J7.2 S2.27 U7.2 | length 22.1
  Top Layer w0.5: J7.2 73.2,68.6 72.8,69 72.8,71.686 73.714,72.6 80,72.6 81.103,73.703 v1(82.9,73.703)
  Bottom Layer w0.4: S2.27 U7.2@86.172,73.703
SIM_VDD: J7.1 S2.25 U7.5 | length 31.2
  Top Layer w0.5: J7.1 72.7,66 71.8,66.9 71.8,72.1 73.3,73.6 79.5,73.6 80.872,74.972 v1(84.2,74.972)
  Bottom Layer w0.4: S2.25 87.428,74.972 88.1,74.3 U7.5@88.1,73.707
TMR1: D5.A R32.1 R33.1 U6.15 | length 76.7
  Top Layer w0.3: 43.6,52.6 46.9,52.6
  Top Layer w0.5: U6.15 40.34,28.44 41.7,29.8 41.7,51.8 42.5,52.6 43.6,52.6 ; 46.9,52.6 52.8,52.6 53.5,51.9 57.9,51.9 59.2,50.6 73.6,50.6 74.4,49.8 D5.A
  Bottom Layer w0.6: R33.1 27.3,27.2 28.54,28.44 U6.15
TXD: R11.1 U4.11 U5.1 U5.4 U6.25 | length 43.7
  Top Layer w0.6: U5.4 53.88,25.88 54.5,26.5 54.5,32.9 53.9,33.5 U5.1
  Bottom Layer w0.3: 57.8,27.1 61.2,27.1
  Bottom Layer w0.5: R11.1@41.7,25.9 55.1,25.9 56.3,27.1 57.8,27.1 ; 61.2,27.1 64.2,27.1 65.6,28.5 U4.11
TXD_GPS: U4.9 U5.9 | length 27.7
  Bottom Layer w0.3: 70.6,27.2 74.6,27.2
  Bottom Layer w0.5: U5.9@59.72,20.9 U5.9 61.5,20.8 62.4,21.7 62.4,23.6 66,27.2 70.6,27.2 ; U4.9 74.42,33.58 75,33 75,27.6 74.6,27.2
TXD_MODEM: S2.43 U5.12 | length 58.7
  Top Layer w0.6: v1(68.8,29.8) v1(68.8,32.7)
  Bottom Layer w0.5: U5.12 63.92,28.42 65.3,29.8 v1(68.8,29.8) ; v1(68.8,32.7) 68.8,38.6 71,40.8 82.2,40.8 83.6,42.2 83.6,62.4 82.707,63.293 82.476,63.524 S2.43
TXD_RS232: J6.2 U4.14 | length 5.8
  Top Layer w1: J6.2@66.6,20.88 U4.14
TXD_RS232_GPS: GPS.4 U4.8 | length 5.4
  Bottom Layer w0.6: U4.8 80,34.8 81.98,36.78 GPS.4
VBAT: C6.1 C12.2 C25.2 C26.1 R1.2 S2.1 S2.3 S2.5 S2.7 S2.9 U3.4 | length 66.5
  Top Layer w0.75: R1.2 54.42,91.88 54.6,91.7 54.6,87 ; C12.2@58.236,86.95 C6.1
  Top Layer w1: U3.4 53.16,82.78 54.6,84.22 54.6,87 ; 54.65,86.986 C12.2
  Bottom Layer w0.6: C6.1 62,90.7 63.65,92.35 68.55,92.35 70.7,94.5 74.1,94.5 74.486,94.114 C25.2 76.2,92.3 77.3,91.2 80.1,91.2 80.4,90.9 S2.1 82.6,90.2 83.1,89.7 83.1,85.7 82.524,85.124 S2.9 ; S2.7 83.093,86.393 ; S2.5 83.1,87.7 ; S2.3 83.1,88.9
VCC: C3.1 C7.2 C9.2 GPS.3 L1.1 U1.1 U2.1 | length 223.7
  Top Layer w0.6: 5.7,23 8.8,23 10.3,21.5 10.3,2.2 11.973,0.527 43.7,0.527 45,1.827 45,5.1 45.7,5.8 62,5.8 64.6,8.4 70.5,8.4 75.9,13.8 86.9,13.8 90.473,17.373 90.473,33.427 88.8,35.1 85.5,35.1 84.52,36.08 GPS.3
  Top Layer w1: U1.1 5.7,23.18 5.7,37 6.8,38.1 12.9,38.1 14.2,39.4 14.2,42.8 15.2,43.8 25.7,43.8 27.083,45.183 27.083,66.217 23.3,70 C7.2 ; C9.2 19,73.2 19,68 U2.1
VDD: C18.1 C19.1 C20.2 L2.1 U6.11 U6.32 | length 32.5
  Top Layer w1: L2.1@18.04,41.54 C18.1 ; C18.1@22,41.6 C18.1@22.1,41.5
  Bottom Layer w1: C18.1 24.16,41.54 27.1,38.6 U6.11 32.1,38.6 33.086,39.586 33.086,42.686 34.08,43.68 U6.32
pads on no net: Designator5.1 GPS.1 GPS.6 GPS.8 J4.3 J7.5 J8.2 J8.6 J8.7 J8.8 S2.11 S2.12 S2.13 S2.14 S2.15 S2.18 S2.20 S2.21 S2.22 S2.23 S2.24 S2.26 S2.28 S2.30 S2.32 S2.34 S2.35 S2.36 S2.38 S2.40 S2.42 S2.44 S2.45 S2.46 S2.47 S2.48 S2.49 S2.50 S2.51 S2.52 S2.53 S2.54 S2.55 S2.56 S2.57 S2.58 S2.59 S2.60 U8.7 U9.7
copper on no net: | length 44.5
  Bottom Layer w0: 71.1,90.9 71.1,89.4 73.7,89.4 ; 73.7,85 73.7,88.5 ; 77.9,53 77.9,89.9

## Polygon pours and split planes (outlines as drawn)
GND on Top Layer (solid, remove dead copper): 0,98 91,98 91,0 0,0
GND on Bottom Layer (solid, remove dead copper): 0,98.1 0,0.1 91,0.1 91,98.1

## Keep-outs
Keep-Out Layer:
  lines w0.254: 0,0 0,98 91,98 91,0 0,0

## Silkscreen, mask and mechanical layers (free items; w line width, h text height)
Top Overlay:
  lines w0.2: 56.531,74.457 ccw(c56.909,73.926) 57.259,74.476
  lines w0.254: 56.9,73.7 56.9,74.6 ; 59.2,100.6 59.2,90.2 60.3,89.1 ; 59.6,89.1 60.3,89.1 ; 60.3,89.9 60.3,89.1
  text "NYXWAVE" at 73.7,89.4 h1.1
  text "PTX90415AG" at 72,87.1 h1.1
  text "REV. 1.01" at 72.8,85 h1.1
  text "SIM CARD" at 90.523,64.4 h1.4 r90
  text "DISPLAY" at 58.2,57.1 h1.4 r90
  text "ZOCALO DIP 2 X 20" at 40.4,28.6 h1.5 r90
  text "MEM.1" at 14.6,25.9 h1.1
  text "RS232" at 64.2,25.3 h1
  text "MEM.2" at 14.4,1.2 h1.1
  text "PS2" at 39.5,0.7 h1.1
Bottom Overlay:
  text "ANT." at 90.3,40.4 h1.1
  text "GPS" at 71.9,0.7 h1.1
Top Solder:
  rectangle: 9.5,45.9 21.4,62.8
  rectangle: 33,75 47.9,87
Bottom Solder:
  rectangle: 36.8,75.8 47.1,86.4